# Altium PCB CH32X035C8T6-R0-1v2.PcbDoc
Units mil, origin at the board's own origin, x right, y up, seen from the top; angles counter-clockwise.
Board outline 2010 x 2355 mil, 2 copper layers (Top Layer, Bottom Layer); 30 components, 60 nets, 195 pads, 409 vias.
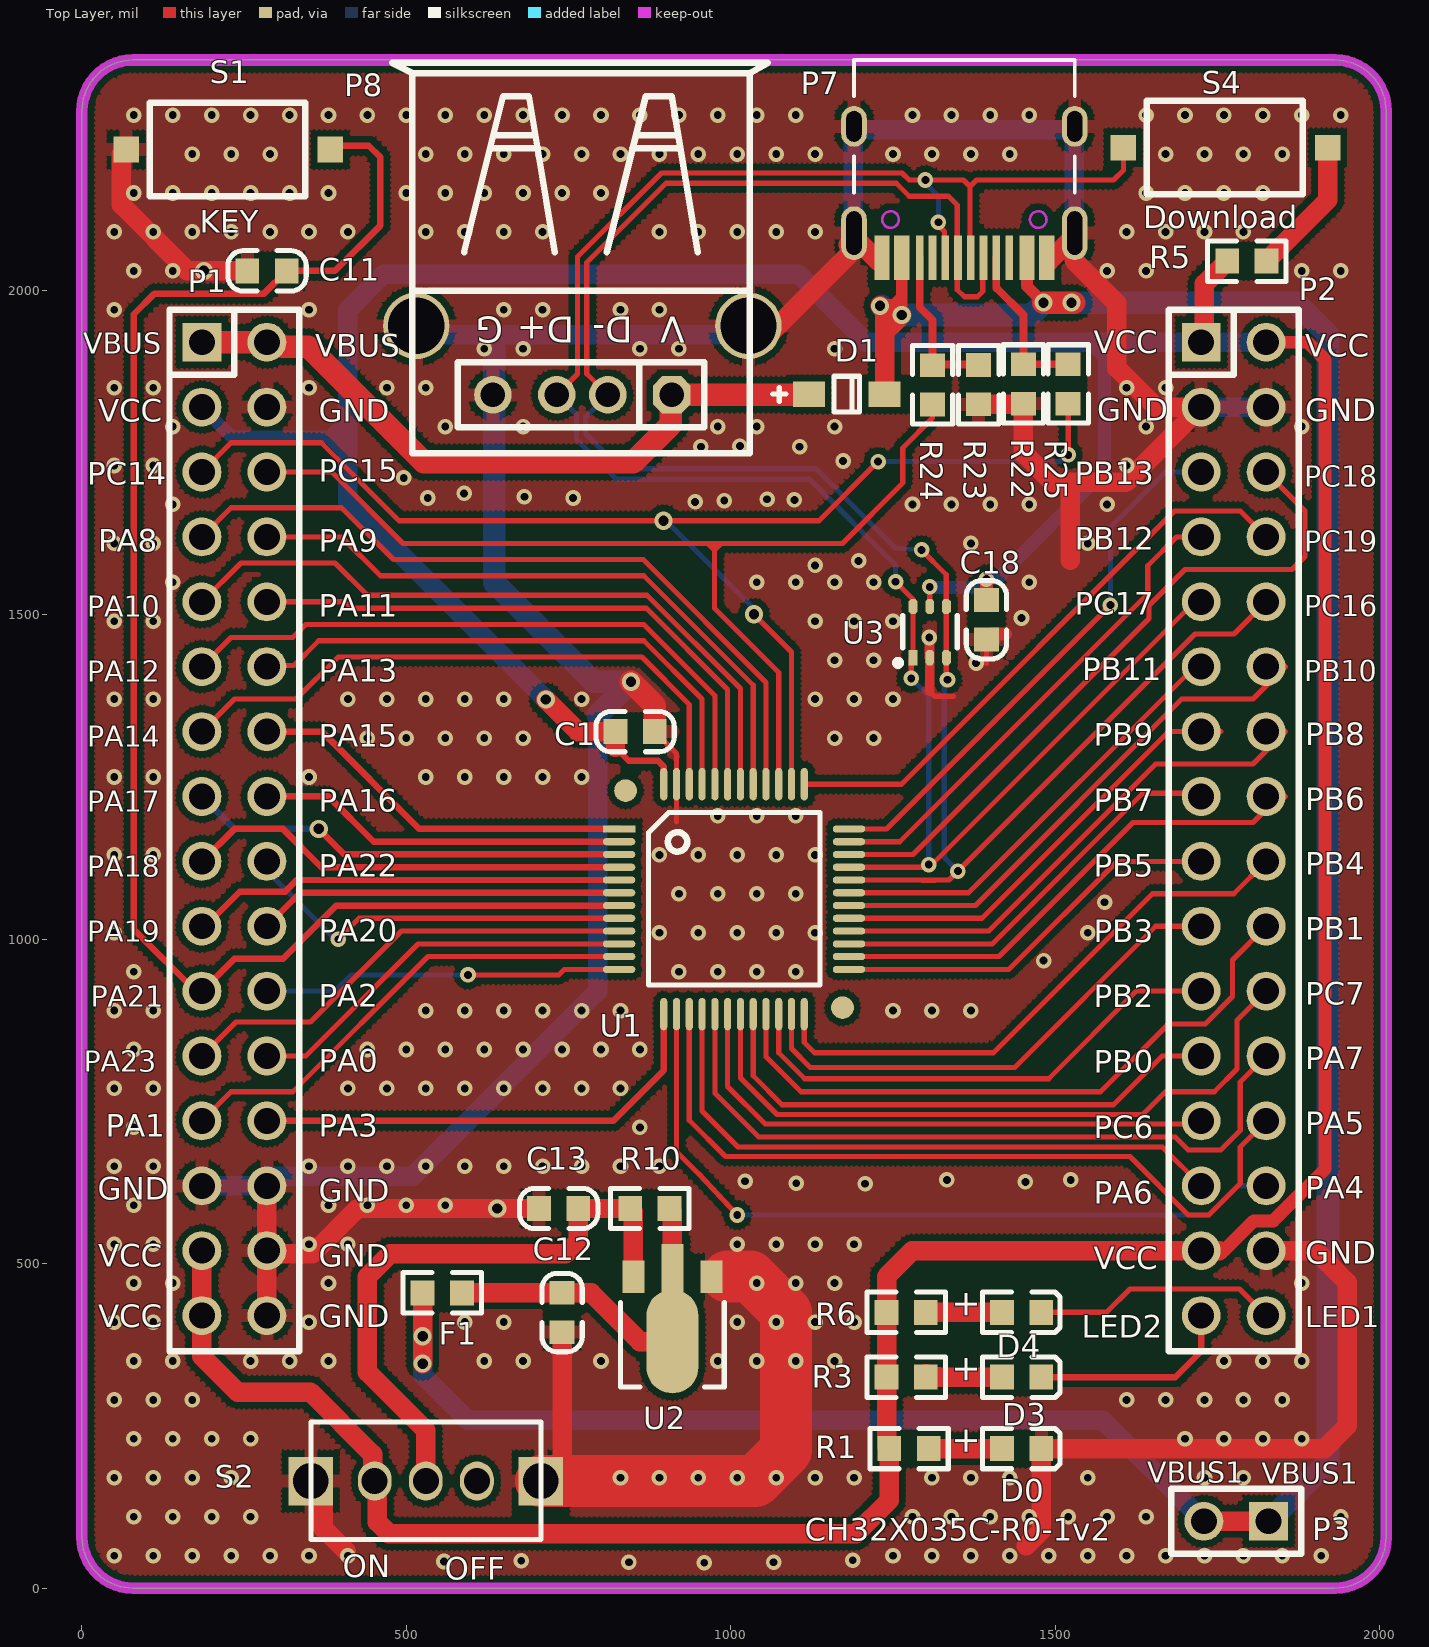
[diagram p0: Top Layer view]
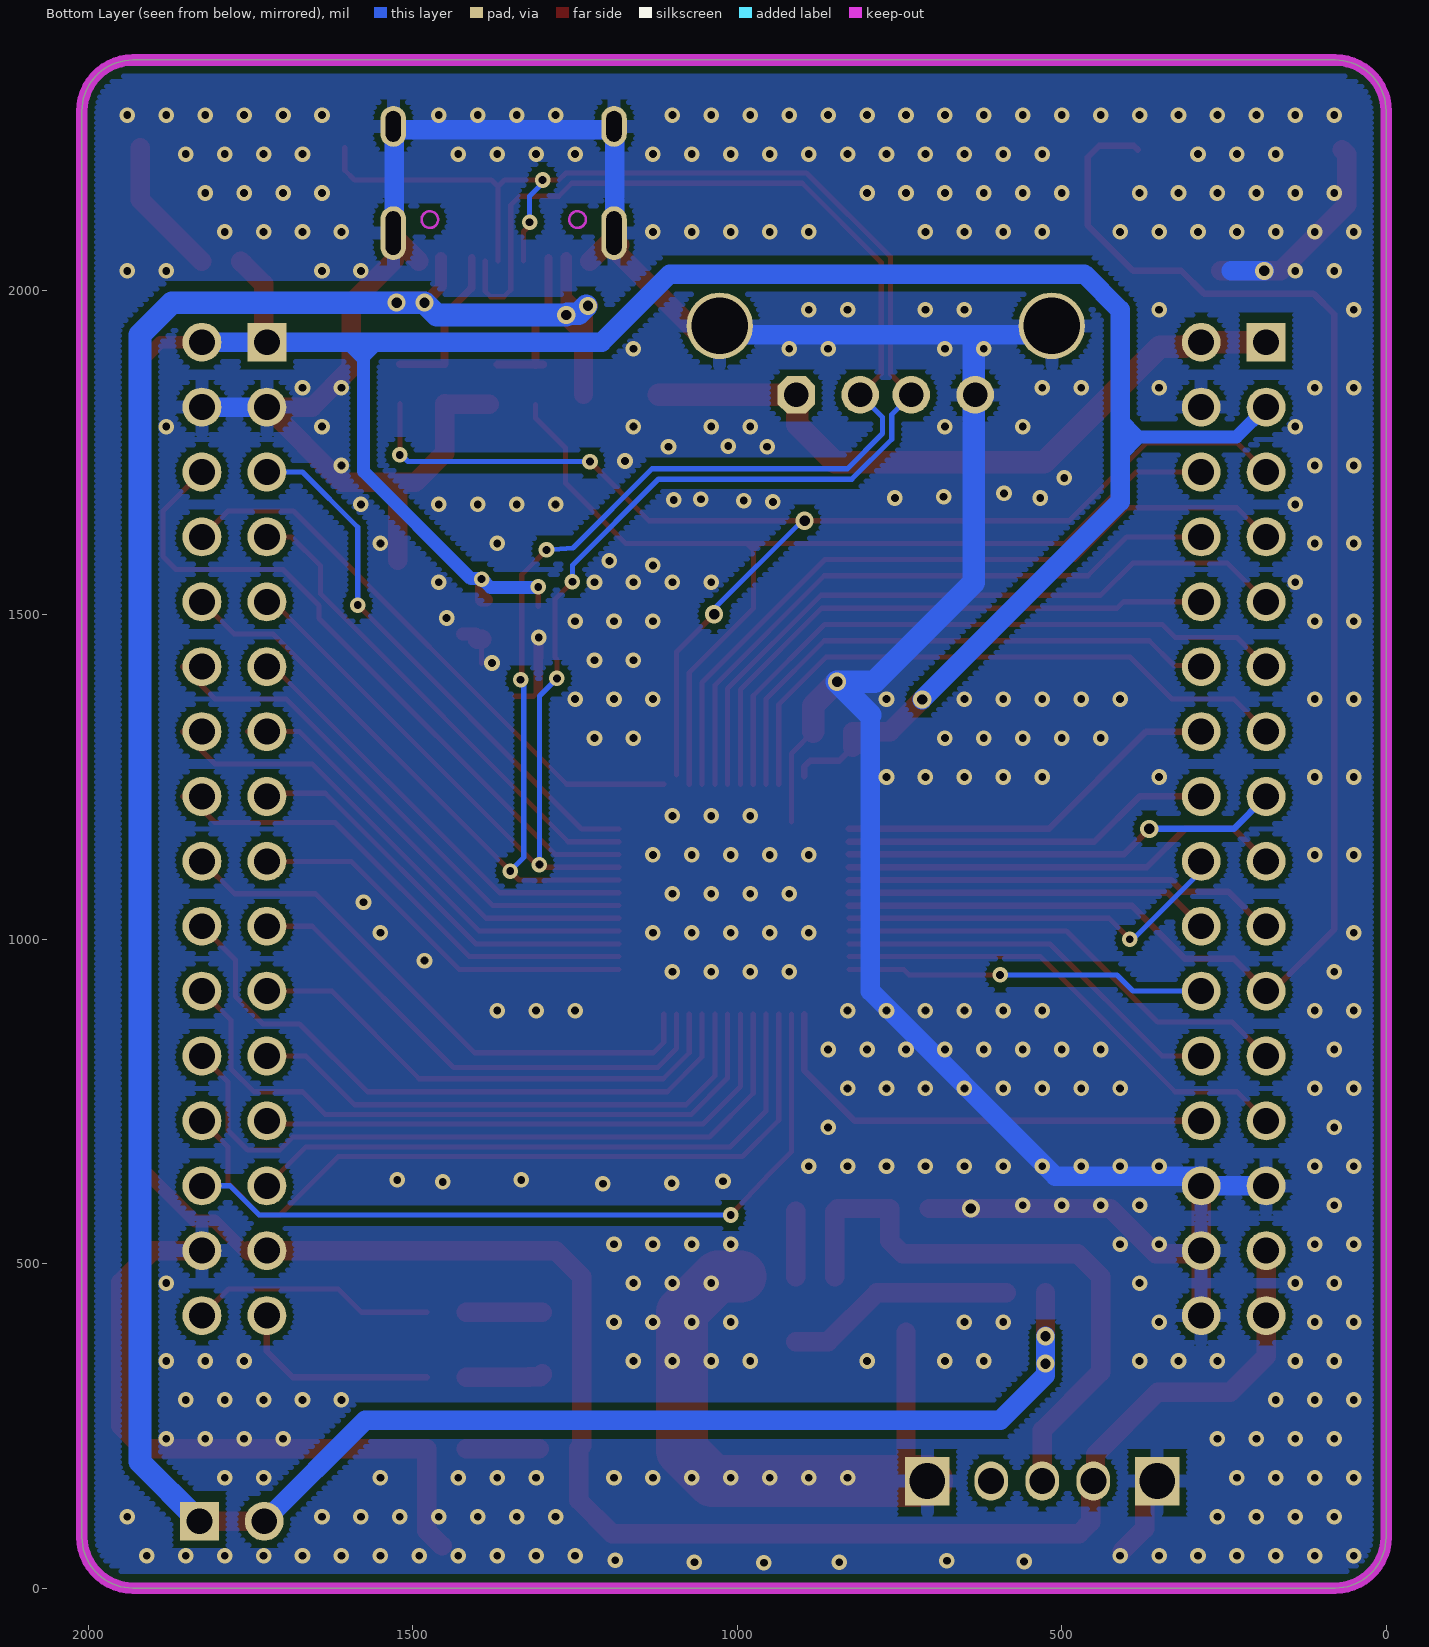
[diagram p1: Bottom Layer view, seen from below]

## Layer stack, top to bottom
Top Solder: solder mask 0.4, Solder Resist, Dk 3.5
Top Layer: signal copper 1.4
Dielectric1: dielectric 12.6, FR-4, Dk 4.8
Bottom Layer: signal copper 1.4
Bottom Solder: solder mask 0.4, Solder Resist, Dk 3.5

## Board outline
0,78.74 0,2276.26 cw(c78.74,2276.26) 78.74,2355 1931.26,2355 cw(c1931.26,2276.26) 2010,2276.26 2010,78.74 cw(c1931.26,78.74) 1931.26,0 78.74,0 cw(c78.74,78.74)

## Design rules (kind name [scope] priority, off if disabled: settings)
Clearance Clearance_1 [InPolygon] p1: gap=10 ignorepadtopadclearanceinfootprint=FALSE except(0: Arc-Hole Track-Hole SMDPad-Hole THPad-Hole Via-Hole Fill-Hole Poly-Hole Region-Hole Text-Hole)
Clearance [All] p2: gap=6 ignorepadtopadclearanceinfootprint=FALSE except(0: Arc-Hole Track-Hole SMDPad-Hole THPad-Hole Via-Hole Fill-Hole Poly-Hole Region-Hole Text-Hole)
ComponentClearance [All] p1 off: gap=10 collisioncheckmode=3 verticalgap=10 showdistances=FALSE
DiffPairsRouting [All] p1: maxlimit=10 minlimit=7 mostfreqgap=8 toplayer_minwidth=15 toplayer_maxwidth=15 toplayer_prefwidth=15 bottomlayer_minwidth=15 bottomlayer_maxwidth=15 bottomlayer_prefwidth=15 maxuncoupledlength=500
MinimumSolderMaskSliver [All] p1 off: minsoldermaskwidth=10
PolygonConnect PolygonConnect_1 [IsVia] p1: connectstyle=Direct reliefconductorwidth=10 reliefentries=4 polygonreliefangle="90 Angle" airgapwidth=10
PolygonConnect [All] p2: connectstyle=Relief reliefconductorwidth=20 reliefentries=4 polygonreliefangle="90 Angle" airgapwidth=10
RoutingVias [All] p1: holewidth=16 width=28 viastyle="Through Hole" minholewidth=12 minwidth=24 maxholewidth=20 maxwidth=32
SilkToSilkClearance [All] p1 off: silktosilkclearance=10
SilkToSolderMaskClearance [IsPad] p1 off: minsilkscreentomaskgap=10 clearancetoexposedcopper=TRUE
SolderMaskExpansion [All] p1: expansion=2 istentingtop=FALSE
Width [All] p1: maxlimit=100 minlimit=6 preferedwidth=10
25 further rules are at their usual default settings.

## Components (designator, comment, footprint, x,y, rotation, side; value= is the part's Value field where it differs from the comment)
C1 "0.1uF" 0603_C 882.83,1320 r180 top
C11 "0.1uF" 0603_C 255,2030 r0 top
C12 "10uF" 0603_C 740,455 r270 top
C13 "10uF" 0603_C 765,585 r180 top
C18 "0.1uF" 0603_C 1394,1462 r90 top
D0 "POWER  red" 0603+ 1418,215 r0 top
D1 "Diode" SOD-123 1120.86,1840 r0 top
D3 "LED2" 0603+ 1418,325 r0 top
D4 "LED1" 0603+ 1418,425 r0 top
F1 "500mA" 0603 525,455 r0 top
P1 "Header 16X2" IDC32-2.54mm 185,1920 r0 top
P2 "Header 16X2" IDC32-2.54mm 1725,1920 r0 top
P3 "HEADER 2" SIP2-2.54mm 1829,103 r90 top
P7 "TYPE-C" TYPE-C-Receptacle-2.0 1360,2050 r180 top
P8 "USB_A" USBAF 909,1839 r180 top
R1 "1K" 0603 1305,215 r180 top
R3 "1K" 0603 1240,325 r0 top
R5 "1K" 0603 1765,2045 r0 top
R6 "1K" 0603 1240,425 r0 top
R10 "NC(0Ω)" 0603 845,585 r0 top
R22 "5.1K" 0603 1451,1886 r270 top
R23 "5.1K" 0603 1382,1885 r270 top
R24 "0Ω" 0603 1311,1824 r90 top
R25 "0Ω" 0603 1520,1886 r270 top
S1 "KEY" SMD_6.1x3.65x2.5mm-KEY 383,2217 r180 top
S2 "SW" SW1 530,165 r180 top locked
S4 "Download" SMD_6.1x3.65x2.5mm-KEY 1920,2220 r180 top
U1 "CH32X035C8T6" LQFP48 827.83,1170 r270 top
U2 "HT7533" SOT-89 970,480 r180 top
U3 "CH412K" SOT-363 1281,1434 r0 top

## Footprints (in the part's own frame and the unit in brackets; to place one, negate y for a bottom-side part, rotate by r counter-clockwise, add the part's x,y. Pads: shape width x height; smd on the part's side, far side on the other; paste and mask are expansions set on the pad)
0603 [mm]
  rect 0.93x0.98 smd: 1(0,0) 2(1.54,0)
  silkscreen extent -0.76,-0.79 2.3,0.79
0603+ [mm]
  rect 0.93x0.98 smd: 1(0,0) 2(1.54,0)
  silkscreen extent -0.76,-0.79 2.27,0.79
0603_C [mm]
  rect 0.93x0.98 smd mask+0.051: 1(0,0) 2(1.54,0)
  silkscreen extent -0.76,-0.79 2.31,0.79
IDC32-2.54mm [mil]
  rect 60x60 hole 40: 1(0,0)
  round 60 hole 40: 2(100,0) 3(0,-100) 4(100,-100) 5(0,-200) 6(100,-200) 7(0,-300) 8(100,-300) 9(0,-400) 10(100,-400) 11(0,-500) 12(100,-500) 13(0,-600) 14(100,-600) 15(0,-700) 16(100,-700) 17(0,-800) 18(100,-800) 19(0,-900) 20(100,-900) 21(0,-1000) 22(100,-1000) 23(0,-1100) 24(100,-1100) 25(0,-1200) 26(100,-1200) 27(0,-1300) 28(100,-1300) 29(0,-1400) 30(100,-1400) 31(0,-1500) 32(100,-1500)
  silkscreen extent -50,-1555 150,50
LQFP48 [mm]
  round 0.889 smd: 0(-1.496,0.254) 0(6.996,8.746)
  rect 0.28x1.27 smd mask+0.051: 1(0,0)
  oval 0.28x1.27 smd mask+0.051: 2(0.5,0) 3(1,0) 4(1.5,0) 5(2,0) 6(2.5,0) 7(3,0) 8(3.5,0) 9(4,0) 10(4.5,0) 11(5,0) 12(5.5,0) 25(5.5,9) 26(5,9) 27(4.5,9) 28(4,9) 29(3.5,9) 30(3,9) 31(2.5,9) 32(2,9) 33(1.5,9) 34(1,9) 35(0.5,9) 36(0,9)
  oval 1.27x0.28 smd mask+0.051: 13(7.25,1.75) 14(7.25,2.25) 15(7.25,2.75) 16(7.25,3.25) 17(7.25,3.75) 18(7.25,4.25) 19(7.25,4.75) 20(7.25,5.25) 21(7.25,5.75) 22(7.25,6.25) 23(7.25,6.75) 24(7.25,7.25) 37(-1.75,7.25) 38(-1.75,6.75) 39(-1.75,6.25) 40(-1.75,5.75) 41(-1.75,5.25) 42(-1.75,4.75) 43(-1.75,4.25) 44(-1.75,3.75) 45(-1.75,3.25) 46(-1.75,2.75) 47(-1.75,2.25) 48(-1.75,1.75)
  silkscreen extent -0.65,1.15 6.11,7.86
SIP2-2.54mm [mil]
  rect 60x60 hole 40: 1(0,0)
  round 60 hole 40: 2(0,100)
  silkscreen extent -50,-50 50,150
SMD_6.1x3.65x2.5mm-KEY [mm]
  rect 1x1 smd: 1(0,0) 2(8,0)
  silkscreen extent 0.98,-1.83 7.08,1.83
SOD-123 [mm]
  rect 1.25x1 smd: 1(0,0) 2(2.95,0)
  silkscreen extent -1.43,-0.7 1.97,0.7
SOT-89 [mil]
  rect 34x50 smd: 1(0,0) 3(120,0)
  rect 34x100 smd: 2(60,0)
  oval 80x160 smd: ""(60,100)
  silkscreen extent -20,40 140,170
SOT-363 [mm]
  rect 0.35x0.6 smd mask+0.051: 1(0,0)
  oct 0.35x0.6 smd mask+0.051: 2(0.65,0) 3(1.3,0) 4(1.3,2) 5(0.65,2) 6(0,2)
  silkscreen extent -0.7,-0.31 1.73,1.65
SW1 [mm]
  rect 1.75x1.9 hole 1.4: 0(-4.5,0) 0(4.5,0)
  oval 1.321x1.524 hole 1.016: 1(0,0) 2(-2,0) 3(2,0)
  silkscreen extent -4.51,-2.31 4.5,2.29
TYPE-C-Receptacle-2.0 [mm]
  oval 1x2.1 hole 0.6 slot 1.7 at 90 deg: 0(-4.32,-0.97) 0(4.32,-0.97)
  oval 1x1.6 hole 0.6 slot 1.2 at 90 deg: 0(-4.32,-5.15) 0(4.32,-5.15)
  rect 0.6x1.75 smd mask+0.051: A1(-3.225,0) A4(-2.45,0) B1(3.225,0) B4(2.45,0)
  rect 0.3x1.75 smd mask+0.051: A5(-1.25,0) A6(-0.25,0) A7(0.25,0) A8(1.25,0) B5(1.75,0) B6(0.75,0) B7(-0.75,0) B8(-1.75,0)
  Keep-Out Layer circle w0.1: c2.89,-1.5 r0.325
  Keep-Out Layer circle w0.1: c-2.89,-1.5 r0.325
  silkscreen extent -4.32,-7.75 4.32,-2.55
USBAF [mm]
  round 2.6 hole 2.2: 0(-3,-2.7) 0(10,-2.7)
  oct 1.473x1.473 hole 0.965: 1(0,0)
  round 1.473 hole 0.965: 2(2.5,0) 3(4.5,0) 4(7,0)
  silkscreen extent -3.75,-12.99 10.95,2.29

## Part data
C1 C11 C18: library part Cap, "Capacitor"
C12 C13: library part CAP, "Capacitor"
D0 D3 D4: library part LED0, "Typical INFRARED GaAs LED", LatestRevisionDate=08-Jul-2005, LatestRevisionNote="Mech Layer 1 removed.", PackageReference=LED-0, Published=8-Jun-2000, Publisher="Altium Limited"
D1: "Default Diode", Code_JEDEC=DO-214-AB, LatestRevisionDate=17-Jul-2002, LatestRevisionNote="Re-released for DXP Platform.", PackageReference=SMC, PackageVersion=Sep-1996, Published=8-Jun-2000, Publisher="Altium Limited"
F1: library part FUSE1, "Fuse"
P1 P2: "Header, 16-Pin, Dual row", LatestRevisionDate=17-Jul-2002, LatestRevisionNote="Re-released for DXP Platform.", Publisher="Altium Limited"
P3: "Header, 2-Pin"
P7: library part TYPE-C1
P8: library part USB, "USB Port"
R1 R3 R6: library part "Res Semi", "Semiconductor Resistor"
R5 R10 R22 R23 R24 R25: library part Res2, "Resistor"
S4: library part KEY1
U1: "RISC-V MCU with USB/PD/ADC/SPI/I2C/UART/OA/CMP"
U2: library part 1117-3.3V
U3: "Qaud ESD protect, high speed"

## Via types
v1: diameter 24, hole 12, Top Layer to Bottom Layer, tented both sides, 396 vias
v2: diameter 28, hole 16, Top Layer to Bottom Layer, tented both sides, 13 vias

## Nets (pads, with @x,y where several pads share a name; then routed paths per layer and width w, separated by ;. In a path a pad name is that pad's centre, name@x,y a point inside that pad or via, vN(x,y) a via of type N, cw(c..) or ccw(c..) an arc to the next point about the centre after c; other vN are vias at no path point)
5V: C12.1 F1.2 R10.2 U2. U2.2 | length 456.1
  Top Layer w30: F1.2 C12.1 785,455 860,380 U2. ; U2.2 R10.2@910,580.63
CC1: P1.5 R25.2 U1.38 | length 1989.1
  Top Layer w8: P1.5 230,1765 368.89,1765 488.89,1645 v2(896.25,1645) 1136,1645 v1(1227,1736) ; v2@1043.37,1492.63 1093.58,1442.42 U1.38@1093.58,1252.9 ; v1(1520,1746.35) R25.2
  Bottom Layer w8: v2(896.25,1645) 900,1645 1035.75,1509.25 v2(1035.75,1500.75) ; v1(1227,1736) 1507.31,1736 1517.66,1746.35 v1(1520,1746.35)
CC2: P1.6 R24.1 U1.39 | length 1644.5
  Top Layer w8: P1.6 385,1720 495,1610 965,1610 ; U1.39 1073.9,1411.1 975,1510 975,1600 ; R24.1 1311,1803.04 1264.9,1756.94 1264.9,1702.9 1172,1610 985,1610 ; 965,1610 975,1600 ; 965,1610 975,1610 ; 975,1600 985,1610 ; 975,1600 975,1610 ; 975,1610 985,1610
GND: C1.1 C11.1 C12.2 C13.2 C18.1 D0.2 P1.4 P1.27 P1.28 P1.30 P1.32 P2.3 P2.4 P2.30 P7.0 P7.A1 P7.B1 P8.0 P8.4 R22.2 R23.2 S1.2 S2.0 U1.47 U2.1 U3.2 | length 8019.5
  Top Layer w8: C1.1 916.42,1286.42 U1.47 916.42,1180.42 ; 1306.59,1382 1314.18,1374.41 1343.41,1374.41 ; 1394,1425 C18.1
  Top Layer w15: v1(1306,1465) 1306.3,1464.7 1306.3,1434.3 U3.2 1306.59,1382
  Top Layer w20: C18.1 1402.31,1470.31 1423.6,1470.31
  Top Layer w30: S1.2 60.61,2209.57 60.61,2132 162.61,2030 v2(188,2030) ; 206.21,2030 v2(188,2030) ; C11.1 217.41,2030 v2(188,2030) ; P1.32 P1.30 ; P1.28 P1.30 ; S2.0@352.83,165 372.28,145.55 372.28,91.82 v1@407.05,57.05 ; C13.2 v2(640,585) 425,585 355,515 290,515 P1.30 ; S2.0@740,197.83 C12.2 ; P8.0@1058.11,1931.3 P7.0@1188.82,2062.01 ; P7.0@1180.83,2070 P7.0@1188.82,2062.01 ; P7.B1@1227.01,2045 1188.82,2083.19 P7.0@1188.82,2062.01 ; R23.2 1450,1824.37 R22.2 1451,1749 1496,1704 1523,1704 ; C18.1 C18.1@1400.67,1462 ; 1455,65 1478.63,88.63 D0.2 1915,215 1950,250 1950,471 1901,520 P2.30 ; P7.A1@1490.79,2045 1528.98,2083.19 1528.98,2046.02 1595,1980 1595,1880 1655,1820 P2.3 1609,1704 1523,1704 ; 1523,1584.33 1523,1704
  Top Layer w35: v2(846.15,1396.68) 882.83,1360 C1.1
  Top Layer w80: S2.0@707.17,165 1038.14,165 1085,211.86 1085,425.14 1030.14,480 995,480
  Bottom Layer w30: P1.27 P1.28 ; v2(188,2030) 238.64,2030 ; P1.28@285,635 510,635 795,920 795,1345.53 ; P8.0@546.3,1931.3 P8.0@1058.11,1931.3 ; P7.0@1188.82,2083.19 1188.82,2247.76 1528.98,2247.76 P7.0@1528.98,2083.19 ; P2.3 P2.4
  Bottom Layer w35: 635.41,1919.71 635.41,1549.59 788.32,1396.68 v2(846.15,1396.68) 795,1345.53
  other v1: 959,39 843,40 1066,40 558,41 677,42 1188,43 50,50 110,50 170,50 230,50 290,50 350,50 410,50 1250,50 1310,50 1370,50 1430,50 1490,50 1550,50 1610,50 1670,50 1730,50 1790,50 1850,50 1910,50 80,110 140,110 200,110 260,110 1280,110 1340,110 1400,110 1460,110 1520,110 1580,110 1640,110 1940,110 50,170 110,170 170,170 230,170 830,170 890,170 950,170 1010,170 1070,170 1130,170 1190,170 1310,170 1370,170 1430,170 1550,170 1730,170 1790,170 80,230 140,230 200,230 260,230 1700,230 1760,230 1820,230 1880,230 50,290 110,290 170,290 1610,290 1670,290 1730,290 1790,290 1850,290 80,350 140,350 260,350 320,350 380,350 620,350 680,350 800,350 980,350 1040,350 1100,350 1160,350 1760,350 1820,350 1880,350 50,410 110,410 350,410 590,410 650,410 1010,410 1070,410 1130,410 1190,410 80,470 140,470 380,470 1040,470 1100,470 1160,470 1880,470 50,530 110,530 350,530 410,530 1010,530 1070,530 1130,530 1190,530 80,590 380,590 440,590 500,590 560,590 1207,623 1101,624 1454,626 1022,627 1333,629 1524,629 50,650 110,650 350,650 410,650 470,650 530,650 590,650 650,650 710,650 770,650 830,650 890,650 80,710 860,710 50,770 110,770 410,770 470,770 530,770 590,770 650,770 710,770 770,770 830,770 80,830 440,830 500,830 560,830 620,830 680,830 740,830 800,830 860,830 50,890 110,890 530,890 590,890 650,890 710,890 770,890 830,890 1250,890 1310,890 1370,890 80,950 920,950 980,950 1040,950 1100,950 1482,967 50,1010 890,1010 950,1010 1010,1010 1070,1010 1130,1010 1550,1010 1576,1057 920,1070 980,1070 1040,1070 1100,1070 50,1130 110,1130 890,1130 950,1130 1010,1130 1070,1130 1130,1130 980,1190 1040,1190 1100,1190 50,1250 110,1250 350,1250 530,1250 590,1250 650,1250 710,1250 770,1250 440,1310 500,1310 560,1310 620,1310 680,1310 1160,1310 1220,1310 50,1370 110,1370 410,1370 470,1370 530,1370 590,1370 650,1370 770,1370 1130,1370 1190,1370 1250,1370 1378,1425.69 1160,1430 1220,1430 50,1490 110,1490 1130,1490 1190,1490 1250,1490 1448,1495 140,1550 1040,1550 1100,1550 1160,1550 1220,1550 1460,1550 1130,1576 1197,1583 50,1610 110,1610 1370,1610 1550,1610 140,1670 1280,1670 1340,1670 1400,1670 1460,1670 1580,1670 945,1674 990,1676 1098,1677 1056,1678 533,1680 757,1680 682,1682 589,1687 496,1711 50,1730 110,1730 1610,1730 1173,1737 954,1759 1106,1759 1014,1760 140,1790 560,1790 680,1790 980,1790 1040,1790 1160,1790 1640,1790 1880,1790 50,1850 110,1850 350,1850 470,1850 530,1850 1610,1850 1670,1850 620,1910 680,1910 860,1910 920,1910 1160,1910 50,1970 350,1970 650,1970 710,1970 830,1970 890,1970 80,2030 140,2030 1580,2030 1640,2030 1880,2030 1940,2030 50,2090 110,2090 170,2090 230,2090 290,2090 350,2090 410,2090 530,2090 590,2090 650,2090 710,2090 890,2090 950,2090 1010,2090 1070,2090 1130,2090 1610,2090 1670,2090 1730,2090 1790,2090 80,2150 140,2150 200,2150 260,2150 320,2150 380,2150 500,2150 560,2150 620,2150 680,2150 740,2150 800,2150 1640,2150 1700,2150 1760,2150 1820,2150 170,2210 230,2210 290,2210 530,2210 590,2210 650,2210 710,2210 770,2210 830,2210 890,2210 950,2210 1010,2210 1070,2210 1130,2210 1250,2210 1310,2210 1370,2210 1430,2210 1670,2210 1730,2210 1790,2210 1850,2210 80,2270 140,2270 200,2270 260,2270 320,2270 380,2270 440,2270 500,2270 560,2270 620,2270 680,2270 740,2270 800,2270 860,2270 920,2270 980,2270 1040,2270 1100,2270 1280,2270 1340,2270 1400,2270 1460,2270 1640,2270 1700,2270 1760,2270 1820,2270 1880,2270 1940,2270
LED1: D4.2 P2.32 | length 378.3
  Top Layer w8: D4.2 1579,425 1615,461 1784,461 P2.32
LED2: D3.2 P2.31 | length 317.9
  Top Layer w10: D3.2 1685,325 1725,365 P2.31
NetC13_1: C13.1 R10.1 S2.1 U2.3 | length 937.1
  Top Layer w30: S2.1 530,243 440,333 440,480 475,515 745,515 765,535 C13.1 R10.1 850,580 U2.3
NetD0_1: D0.1 R1.1 | length 113
  Top Layer w30: R1.1 D0.1
NetD3_1: D3.1 R3.2 | length 120
  Top Layer w30: R3.2@1300.63,330 1300.63,329.02 1303.94,325.71 1320.8,325.71 1321.51,325 D3.1
NetD4_1: D4.1 R6.2 | length 117.4
  Top Layer w30: R6.2 D4.1
NetP7_A5: P7.A5 R22.1 R25.1 | length 252.8
  Top Layer w12: P7.A5 1409.21,2003.79 ; 1411,2002 1409.21,2003.79 ; R25.1 R22.1 1451,1962 1409.21,2003.79
NetP7_B5: P7.B5 R23.1 R24.2 | length 244
  Top Layer w12: P7.B5 1291.1,1973.9 1311,1954 R24.2@1311,1885.63 ; R24.2@1299,1885.63 R24.2@1311,1885.63 ; R24.2 R24.2@1311,1885.63 ; R23.1@1369.37,1885.63 R24.2@1311,1885.63
NetR5_2: R5.2 S4.1 | length 214.1
  Top Layer w30: R5.2 1920,2139.37 S4.1
PA0: P1.24 U1.10 | length 614.4
  Top Layer w8: P1.24 345,820 517.84,992.84 U1.10
PA1: P1.25 U1.11 | length 747.7
  Top Layer w8: P1.25 230,765 325,765 533.15,973.15 U1.11
PA2: P1.22 U1.12 | length 556.7
  Top Layer w8: v1(595,945) 735,945 743.47,953.47 U1.12
  Bottom Layer w8: P1.22 390,920 415,945 v1(595,945)
PA3: P1.26 U1.13 | length 730.8
  Top Layer w10: P1.26 819,720 896.73,797.73 U1.13
PA4: P2.28 U1.14 | length 1185.9
  Top Layer w8: U1.14 916.42,672.55 949.95,639.02 v1(1010,575)
  Bottom Layer w8: v1(1010,575) 1736.57,575 1781.57,620 P2.28 P2.28@1830,620
PA5: P2.26 U1.15 | length 1206.2
  Top Layer w8: U1.15 936.1,720.9 992,665 1615,665 1705,575 1736.57,575 1785,623.43 1785,680 P2.26
PA6: P2.27 U1.16 | length 966.3
  Top Layer w8: U1.16 955.79,735.21 1011,680 1665,680 P2.27
PA7: P2.24 U1.17 | length 1111.8
  Top Layer w8: U1.17 975.47,762.53 1043,695 1685,695 1705,675 1755,675 1785,705 1785,780 P2.24
PA8: P1.7 U1.40 | length 1156.3
  Top Layer w8: P1.7 230,1665 400,1665 480,1585 865,1585 1054.21,1395.79 U1.40
PA9: P1.8 U1.41 | length 996.8
  Top Layer w8: P1.8 400,1620 460,1560 866,1560 1034.53,1391.47 U1.41
PA10: P1.9 U1.42 | length 1082.2
  Top Layer w8: P1.9 245,1580 390,1580 440,1530 871,1530 1014.84,1386.16 U1.42
PA11: P1.10 U1.43 | length 912.1
  Top Layer w8: P1.10 405,1520 415,1510 870,1510 995.16,1384.84 U1.43
PA12: P1.11 U1.44 | length 999.3
  Top Layer w8: P1.11 230,1465 325,1465 345,1485 865.8,1485 975.47,1375.33 U1.44
PA13: P1.12 U1.45 | length 855.9
  Top Layer w8: P1.12 287,1422 327,1422 365,1460 866,1460 955.79,1370.21 U1.45
PA14: P1.13 U1.46 | length 952
  Top Layer w8: P1.13 235,1370 330,1370 395,1435 863,1435 936.1,1361.9 U1.46
PA15: P1.14 U1.1 | length 605
  Top Layer w10: P1.14 370,1320 520,1170 U1.1
PA16: P1.16 U1.2 | length 571.7
  Top Layer w10: P1.16 380,1220 449.69,1150.32 U1.2
PA17: P1.15 U1.3 | length 679.9
  Top Layer w10: v2(365,1170) 404.37,1130.63 U1.3
  Bottom Layer w10: P1.15 235,1170 v2(365,1170)
PA18: P1.17 U1.4 | length 688
  Top Layer w10: P1.17 235,1170 310,1170 369.06,1110.95 U1.4
PA19: P1.19 U1.5 | length 672.4
  Top Layer w10: P1.19 190,1020 243.13,1073.13 313.13,1073.13 331.26,1091.26 U1.5
PA20: P1.20 U1.6 | length 564.2
  Top Layer w10: P1.20 336.57,1071.57 U1.6
PA21: C11.2 P1.21 S1.1 U1.7 | length 2422.6
  Top Layer w10: S1.1 389,2223 442,2223 460,2205 460,2100 390,2030 C11.2 280.63,1995 112,1995 80,1963 80,1015 180,915 P1.21 235,970 310,970 391.89,1051.89 U1.7
PA22: P1.18 U1.8 | length 628
  Top Layer w8: v1(395,1000) 427.2,1032.2 U1.8
  Bottom Layer w8: P1.18@265,1125 390,1000 v1(395,1000)
PA23: P1.23 U1.9 | length 722.6
  Top Layer w8: P1.23 237.5,872.5 352.5,872.5 492.52,1012.52 U1.9
PB0: P2.23 U1.20 | length 835.1
  Top Layer w8: U1.20 1034.53,789.47 1079,745 1590,745 1665,820 P2.23
PB1: P2.20 U1.21 | length 1002.6
  Top Layer w8: U1.21 1054.21,818.79 1108,765 1570,765 1674.57,869.57 1731.14,869.57 1773.09,911.52 1773.09,968.09 P2.20 P2.20@1830,1020
PB2: P2.21 U1.22 | length 783.1
  Top Layer w8: U1.22 1073.9,825.1 1114,785 1490,785 1625,920 P2.21
PB3: P2.19 U1.23 | length 786.6
  Top Layer w8: U1.23 1093.58,831.42 1122.5,802.5 1437.5,802.5 1655,1020 P2.19
PB4: P2.18 U1.24 | length 884.3
  Top Layer w8: U1.24 1113.27,840.73 1129,825 1405,825 1650,1070 1775,1070 P2.18
PB5: P2.17 U1.25 | length 612.9
  Top Layer w8: U1.25 1428.47,953.47 1595,1120 1722.5,1120 P2.17@1725,1117.5
PB6: P2.16 U1.26 | length 775.1
  Top Layer w8: U1.26 1413.15,973.15 1620,1180 1805,1180 1845,1220 1855,1220
PB7: P2.15 U1.27 | length 664
  Top Layer w8: U1.27 1402.84,992.84 1635,1225 P2.15@1750,1225
PB8: P2.14 U1.28 | length 800.2
  Top Layer w8: U1.28 1397.52,1012.52 1655,1270 1805,1270 1855,1320
PB9: P2.13 U1.29 | length 692
  Top Layer w8: U1.29 1387.2,1032.2 1675,1320 P2.13 1755,1320
PB10: P2.12 U1.30 | length 825.3
  Top Layer w8: U1.30 1376.89,1051.89 1695,1370 1805,1370 1855,1420
PB11: P2.11 U1.31 | length 687.2
  Top Layer w8: U1.31 1366.57,1071.57 1715,1420 P2.11
PB12: P2.7 U1.35 | length 762.7
  Top Layer w8: U1.35 1260.52,1150.32 1642.5,1532.3 1642.5,1575.5 1687,1620 P2.7
PB13: P2.5 U1.36 | length 840.9
  Top Layer w8: U1.36 1240,1170 v1(1585,1515)
  Bottom Layer w8: v1(1585,1515) 1585,1635 1670,1720 P2.5
PC6: P2.25 U1.18 | length 900.5
  Top Layer w8: U1.18 995.16,772.84 1053,715 1605,715 ; 1615,715 1605,715 ; P2.25@1750,715 1605,715
PC7: P2.22 U1.19 | length 1054.5
  Top Layer w8: U1.19 1014.84,786.16 1071,730 1635,730 1670,765 1745,765 1780,800 1780,875 P2.22
PC16: P2.10 P7.A7 P7.B7 P8.2 U1.32 U3.3 U3.4 | length 3084.2
  Top Layer w8: P8.2 778,1871.57 778,2043 900,2165 1255,2165 1275,2145 1335.63,2145 1349.06,2131.57 1349.06,2050 1349.06,2000.94 1360,1990 1380,1990 1388.43,1998.43 P7.B7@1388.43,2045 ; U1.32 1294.8,1091.26 1295.06,1091 1314.94,1091 1315.2,1091.26 1336.26,1091.26 v1(1350,1105) 1715.27,1470.27 1775.27,1470.27 P2.10 ; v1(1294,1600) 1332.18,1561.82 U3.4 1332.18,1407.51 1329,1404.33 v1@1329,1400
  Bottom Layer w8: P8.2 776,1804.43 776,1779.2 830.2,1725 1131.43,1725 1253.33,1603.1 v1(1294,1600) ; v1@1329,1400 1329,1126 v1(1350,1105)
  other v1: 1334,1400
PC17: P2.9 P7.A6 P7.B6 P8.3 S4.2 U1.33 U3.1 U3.6 | length 3272.4
  Top Layer w8: P8.3 764,1871.17 764,2051.63 893.37,2181 1264,2181 1275,2170 v1(1300,2170) 1358.74,2170 1368.74,2160 ; U1.33 1305.94,1110.95 1715,1520 P2.9 ; v1(1254,1551) 1281,1524 U3.6 U3.1 1278,1431 v1(1278,1402) ; v1@1320,2100 1329.37,2090.63 P7.B6@1329.37,2045 ; P7.A6@1368.74,2045 1368.74,2160 ; S4.2 1605.04,2185.04 1590,2170 1378.74,2170 1368.74,2160
  Bottom Layer w8: P8.3 762,1808.83 762,1770.58 823.58,1709 1121.46,1709 1254,1576.46 v1(1254,1551) ; v1(1278,1402) 1305,1375 v1(1305,1115) ; v1@1300,2165 1320,2145 v1(1320,2105) v1@1320,2100
PC18: P2.6 U1.34 | length 1059.7
  Top Layer w8: U1.34 1280.63,1130.63 1644.44,1494.44 1644.44,1514.44 1700,1570 1865,1570 1885,1590 1885,1660 P2.6
PC19: P2.8 U1.37 | length 902.7
  Top Layer w8: U1.37 1262.9,1238.9 1684,1660 1785,1660 P2.8
VBUS: D1.1 P1.1 P1.2 P8.1 | length 1081.7
  Top Layer w35: P1.1 260,1920 P1.2 289.78,1915.22 307.46,1915.22 309.68,1913 349,1913 527,1735 849.55,1735 907.4,1792.85 907.4,1837.4 P8.1 D1.1@1120.86,1839
VBUS1: D1.2 F1.1 P3.1 P3.2 P7.A4 P7.B4 | length 4621.3
  Top Layer w18: v2@1254.54,1953 1231.54,1976 v2(1230,1976) 1231.91,1977.91 1252.01,1977.91 1263.54,1989.45 ; v2(1263.54,1962) 1263.54,1989.45 ; P7.B4 1263.54,1989.45 ; P7.A4 1456.46,2006.54 v2(1482,1981)
  Top Layer w30: v2(525,346) v2(525,388) F1.1 ; v2(1230,1976) 1237,1969 1237,1935.46 ; D1.2 1237,1935.46 ; v2(1263.54,1962) 1254.54,1953 1237,1935.46 ; P3.2 P3.1
  Top Layer w35: v2(1482,1981) v2@1529,1981
  Bottom Layer w18: v2(1230,1976) v2@1232.71,1976 ; v2@1261.63,1963.91 v2(1263.54,1962)
  Bottom Layer w30: v2(525,388) v2(525,346) 525,328.33 594.33,259 1573,259 P3.2
  Bottom Layer w35: v2@1232.71,1976 1244.79,1963.91 v2@1261.63,1963.91 ; v2(1263.54,1962) 1463,1962 v2(1482,1981) 1871,1981 1920.5,1931.5 1920.5,194.5 P3.1
  other v2: 1525,1981
VCC: C1.2 C18.2 P1.3 P1.29 P1.31 P2.1 P2.2 P2.29 R1.2 R3.1 R5.1 R6.1 S2.3 U1.48 U3.5 | length 7474.1
  Top Layer w8: U3.5 v1(1306.59,1543)
  Top Layer w10: 822.2,1295.63 842.83,1275 887.83,1275 896.73,1266.1 U1.48@896.73,1251.1
  Top Layer w20: C18.2@1386.37,1522.63 C18.2 v1(1394,1554.94) ; P2.29@1752.88,520 1759.95,520 1805.95,566 1836.05,566 1916,645.95 1916,1893 1889,1920 P2.2
  Top Layer w30: P1.29 P1.31 185,357 240,302 352,302 447.93,206.07 447.93,168.33 455.47,160.79 455.47,101.57 473.04,84 1193,84 1244.37,135.37 R1.2 ; v2(715,1369.37) 764.37,1320 C1.2 822.2,1295.63 ; R1.2@1240,219.37 R3.1 R6.1 1240,480 1280,520 P2.29 P2.29@1752.88,520 ; P2.1@1730,1909.43 1730,2010 1760.71,2040.71 1761.69,2040.71 1765,2044.02 R5.1
  Bottom Layer w20: P1.3 231,1774 380,1774 ; 410,1744 380,1774 ; 410,1765 401,1774 381,1774 ; 410,1803 381,1774 ; v1(1306.59,1543) 1307.36,1542.23 1310.18,1542.23 1310.42,1542 1380.28,1542 1393.22,1554.94 v1(1394,1554.94) 1394.77,1555.7 1410.7,1555.7 1576,1721 1576,1894 ; 1553,1920 1576,1897 ; 1576,1920 1576,1897 ; 1602,1920 1576,1894 ; 380,1774 381,1774 ; 1576,1894 1576,1897
  Bottom Layer w30: v2(715,1369.37) 410,1674.37 410,1744 410,1765 410,1803 410,1970 465,2025 1104,2025 1209,1920 1553,1920 1576,1920 1602,1920 P2.1 P2.2
pads on no net: P7.A8 P7.B8 S2.2 U1.0

## Polygon pours and split planes (outlines as drawn)
GND on Bottom Layer "GND" (hatched Horizontal grid 8 track 8, remove dead copper, pour order 2): 2010,0 0,0 0,2355 2010,2355
GND on Top Layer "GND" (hatched 90Degree grid 8 track 8, remove dead copper, pour order 0): 0,2355 2010,2355 2010,0 0,0

## Keep-outs
Keep-Out Layer:
  the board outline again, w18

## Silkscreen, mask and mechanical layers (free items; w line width, h text height)
Top Overlay:
  text "VCC" at 1559.16,1903 h35
  text "VBUS" at 2.01,1902 h32
  text "VBUS" at 360,1898 h35
  text "VCC" at 1885,1898 h35
  text "GND" at 1564.56,1799.36 h35
  text "VCC" at 25,1797.8 h35
  text "GND" at 365,1797.8 h35
  text "GND" at 1885,1798.13 h35
  text "PC15" at 365,1705 h35
  text "PB13" at 1530,1701.36 h35
  text "PC14" at 8,1700 h35
  text "PC18" at 1884,1697.27 h32
  text "PB12" at 1530,1600.54 h35
  text "PA8" at 25,1597.4 h35
  text "PA9" at 365,1597.4 h35
  text "PC19" at 1884,1597.4 h32
  text "PC17" at 1530,1499.72 h35
  text "PC16" at 1884,1497.53 h32
  text "PA10" at 8.34,1497.2 h32
  text "PA11" at 365,1497.2 h35
  text "PB11" at 1541.66,1398.9 h35
  text "PB10" at 1884,1397.67 h32
  text "PA12" at 8.34,1397 h32
  text "PA13" at 365,1397 h35
  text "PB8" at 1885,1298.8 h35
  text "PB9" at 1559.16,1298.08 h35
  text "PA14" at 8.34,1296.8 h32
  text "PA15" at 365,1296.8 h35
  text "PB6" at 1885,1198.93 h35
  text "PA17" at 8.34,1196.6 h32
  text "PA16" at 365,1196.6 h35
  text "PB7" at 1559.16,1197.26 h35
  text "PB4" at 1885,1099.07 h35
  text "PA18" at 8.34,1096.4 h32
  text "PA22" at 365,1096.4 h35
  text "PB5" at 1559.16,1096.44 h35
  text "PB1" at 1885,999.2 h35
  text "PA19" at 8.34,996.2 h32
  text "PA20" at 365,996.2 h35
  text "PB3" at 1559.16,995.62 h35
  text "PC7" at 1885,899.33 h35
  text "PA21" at 13.67,896 h32
  text "PA2" at 365,896 h35
  text "PB2" at 1559.16,894.8 h35
  text "PA7" at 1885,799.47 h35
  text "PA23" at 3.01,795.8 h32
  text "PA0" at 365,795.8 h35
  text "PB0" at 1559.16,793.98 h35
  text "PA5" at 1885,699.6 h35
  text "PA1" at 36.66,695.6 h35
  text "PA3" at 365,695.6 h35
  text "PC6" at 1559.16,693.16 h35
  text "PA4" at 1885,599.73 h35
  text "GND" at 24.56,598.36 h35
  text "GND" at 365,595.4 h35
  text "PA6" at 1559.16,592.34 h35
  text "GND" at 1885,499.87 h35
  text "VCC" at 25,495.2 h35
  text "GND" at 365,495.2 h35
  text "VCC" at 1559.16,491.52 h35
  text "VCC" at 25,402 h35
  text "GND" at 365,402 h35
  text "LED1" at 1885,402 h32
  text "LED2" at 1541,386 h35
  text "VBUS1" at 1642,162 h32
  text "VBUS1" at 1818,161 h32
  text "CH32X035C-R0-1v2" at 1114,73 h35
  text "ON" at 402,17 h35
  text "OFF" at 559,13 h35
Mechanical 1:
  the board outline again, w10

## Text inside footprints (layer, text, board x,y; h text height)
D0: Top Overlay "+" at 1379.92,204.01 h40 r90
D3: Top Overlay "+" at 1379.92,314.01 h40 r90
D4: Top Overlay "+" at 1379.92,414.01 h40 r90
P8: Top Overlay "G" at 649,1959 h40 r180; Top Overlay "V" at 929,1959 h40 r180; Top Overlay "D+" at 759,1959 h40 r180; Top Overlay "D-" at 849,1959 h40 r180